# Altium PCB Cap_Sensor_8x8.PcbDoc
Units mil, origin at the board's own origin, x right, y up, seen from the top; angles counter-clockwise.
Board outline 3170 x 4550 mil, 2 copper layers (Top Layer, Bottom Layer); 74 components, 83 nets, 392 pads, 146 vias.
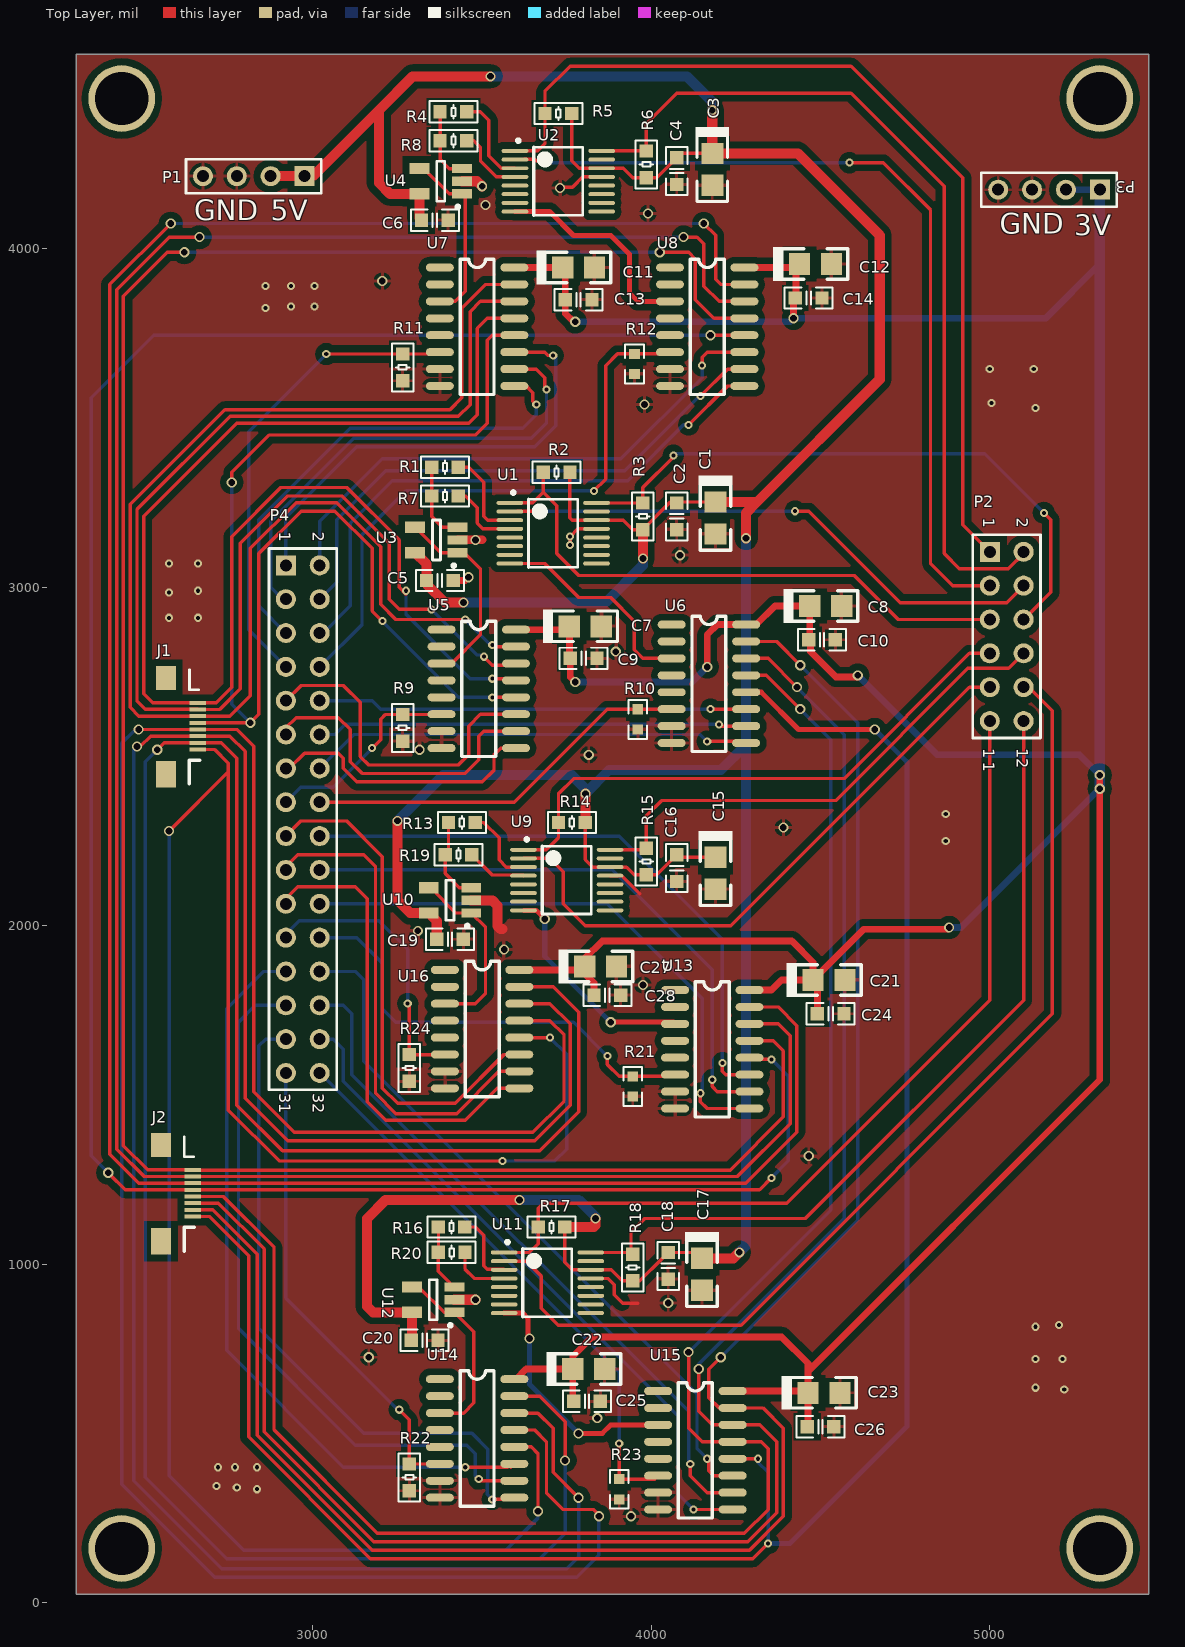
[diagram p0: Top Layer view]
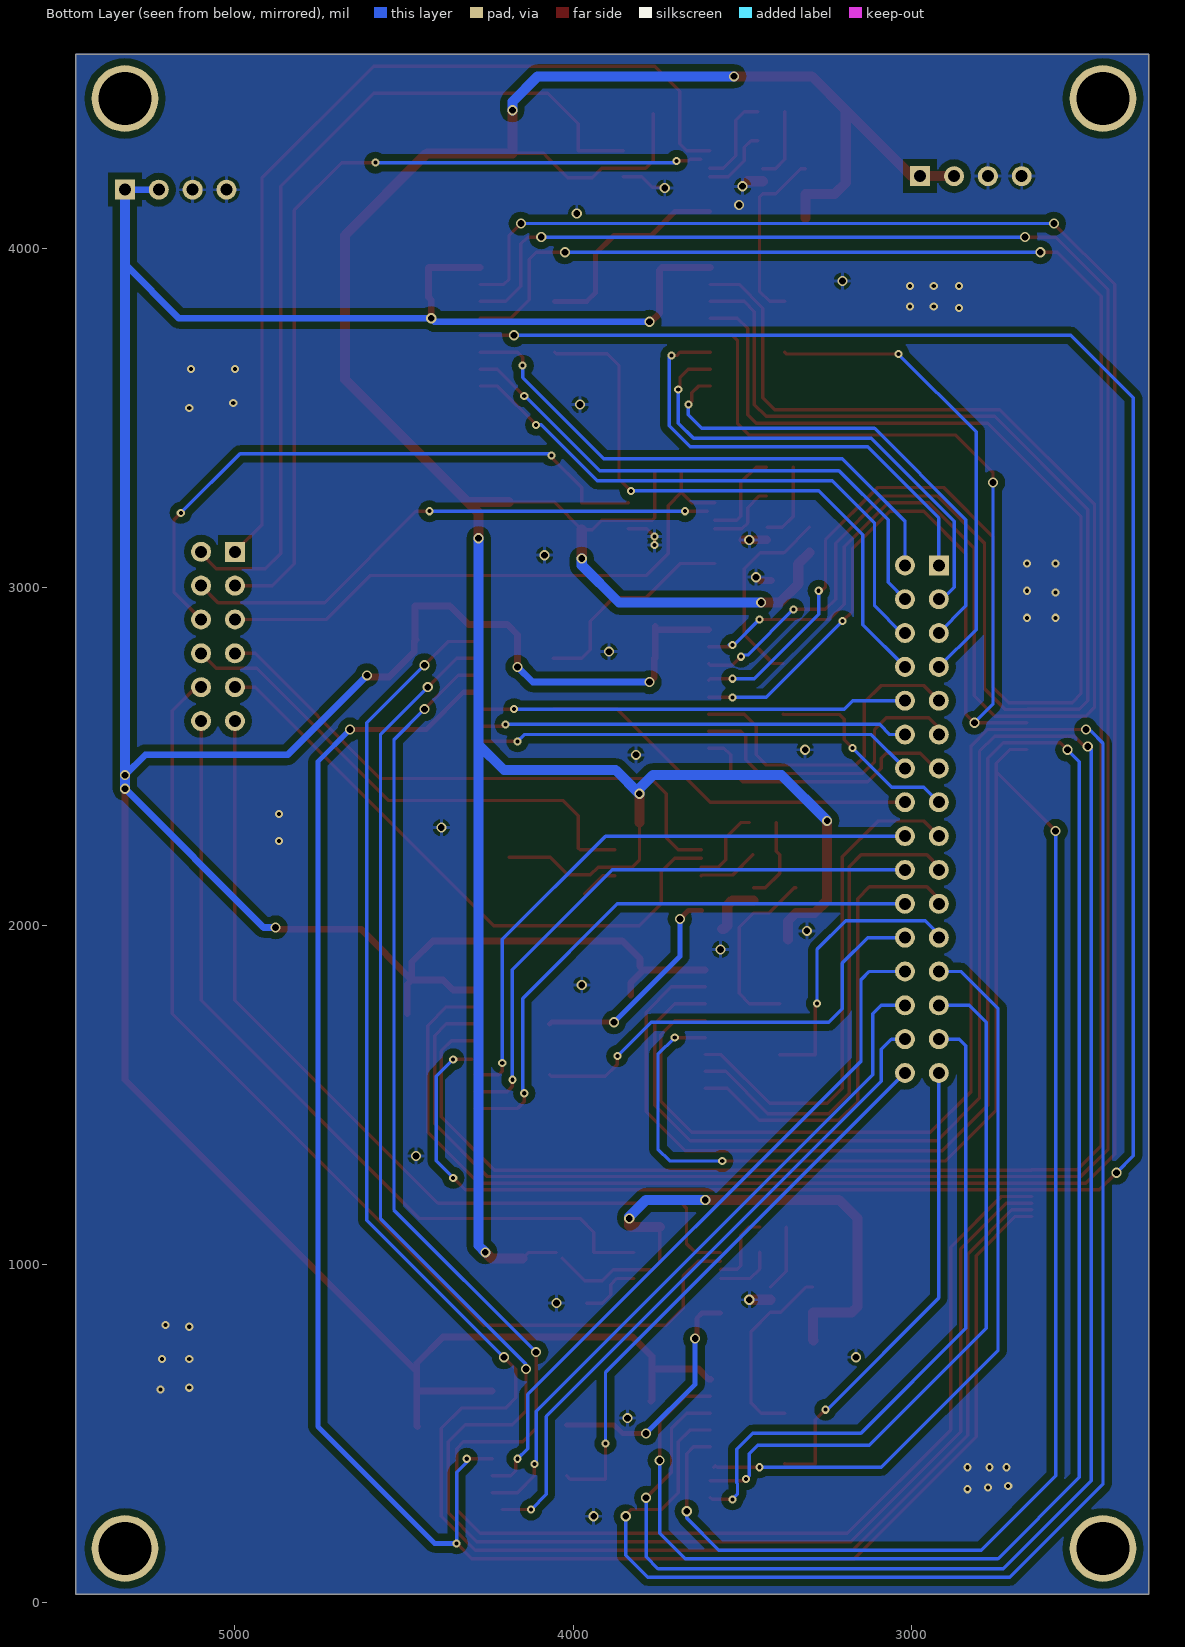
[diagram p1: Bottom Layer view, seen from below]
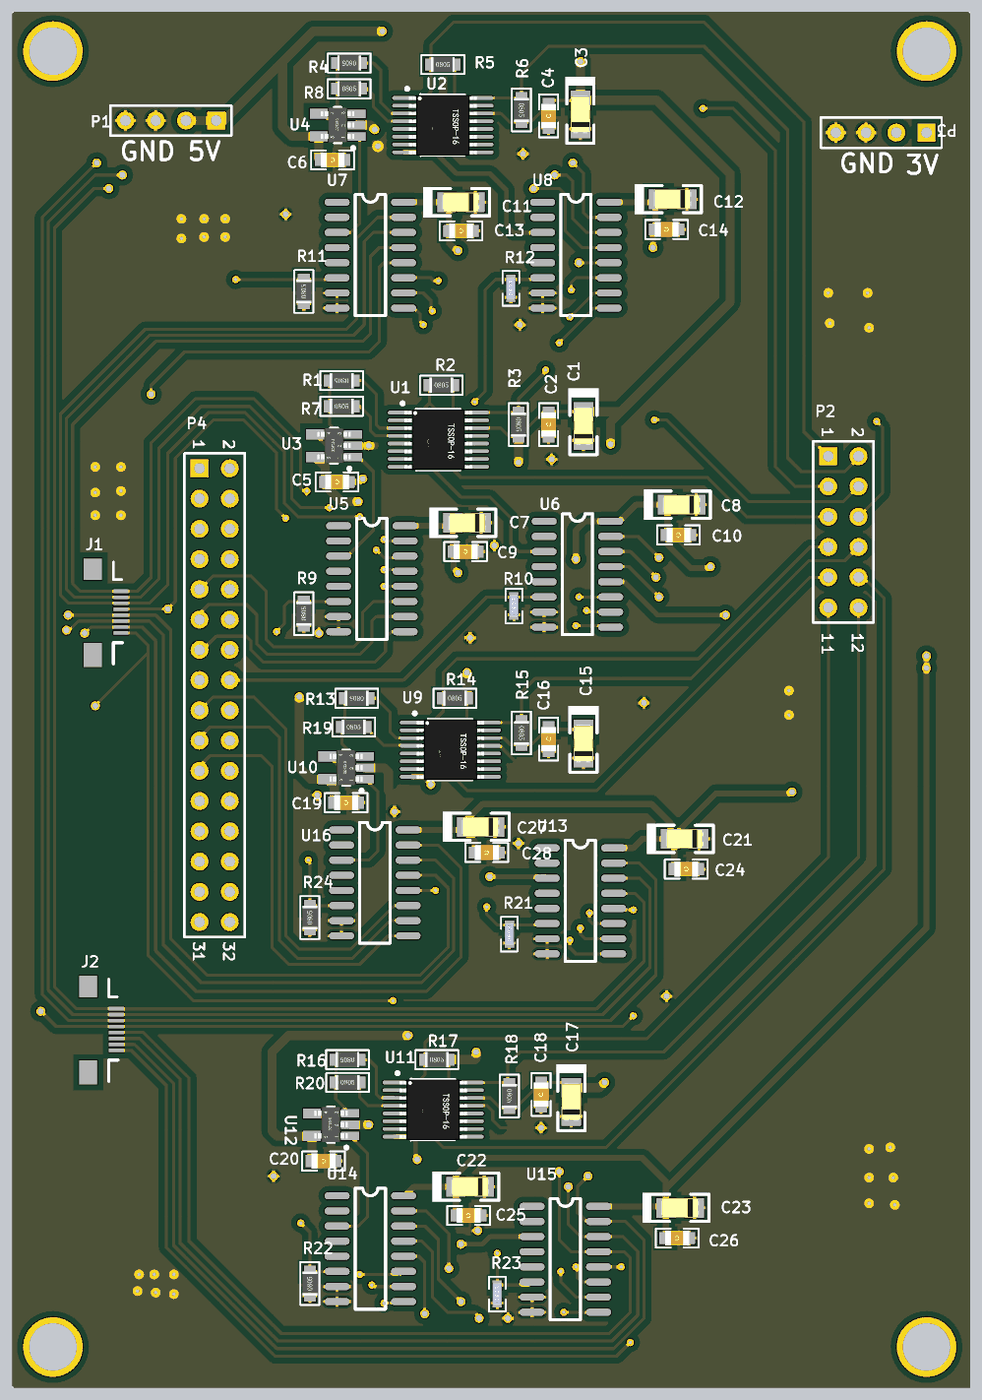
[diagram p2: 3D render of the assembled board from above, using the file's embedded part models]

## Layer stack, top to bottom
Top Solder: solder mask 0.4, Solder Resist, Dk 3.5
Top Layer: signal copper 1.4
Dielectric 1: dielectric 12.6, FR-4, Dk 4.8
Bottom Layer: signal copper 1.4
Bottom Solder: solder mask 0.4, Solder Resist, Dk 3.5

## Board outline
2300,25 2300,4575 5470,4575 5470,25

## Design rules (kind name [scope] priority, off if disabled: settings)
Clearance Clearance_1 [InPolygon] p1: gap=20 ignorepadtopadclearanceinfootprint=FALSE except(0: Arc-Hole Track-Hole SMDPad-Hole THPad-Hole Via-Hole Fill-Hole Poly-Hole Region-Hole Text-Hole)
Clearance [All] p2: gap=4 ignorepadtopadclearanceinfootprint=FALSE except(0: Arc-Hole Track-Hole SMDPad-Hole THPad-Hole Via-Hole Fill-Hole Poly-Hole Region-Hole Text-Hole)
PolygonConnect [All] p1: connectstyle=Relief reliefconductorwidth=10 reliefentries=4 polygonreliefangle="90 Angle" airgapwidth=10
RoutingVias [All] p1: holewidth=20 width=30 viastyle="Through Hole" minholewidth=20 minwidth=30 maxholewidth=20 maxwidth=30
SolderMaskExpansion [All] p1: expansion=4
Width Width_1 [All] p1: maxlimit=30 minlimit=10 preferedwidth=20
Width Width_vcc [InNet('VDD_5V')] p2: maxlimit=50 minlimit=10 preferedwidth=20
30 further rules are at their usual default settings.

## Components (designator, comment, footprint, x,y, rotation, side; value= is the part's Value field where it differs from the comment)
C1 "Cap Pol2" Cap-TA 4190,3205 r90 top
C2 "Cap" 0805C 4075,3210 r90 top
C3 "Cap Pol2" Cap-TA 4180,4235 r90 top
C4 "Cap" 0805C 4075,4230 r90 top
C5 "Cap" 0805C 3375,3020 r180 top
C6 "Cap" 0805C 3360,4085 r180 top
C7 "Cap Pol2" Cap-TA 3805,2885 r180 top
C8 "Cap Pol2" Cap-TA 4515,2945 r180 top
C9 "Cap" 0805C 3800,2790 r180 top
C10 "Cap" 0805C 4504.37,2845 r180 top
C11 "Cap Pol2" Cap-TA 3785,3945 r180 top
C12 "Cap Pol2" Cap-TA 4485,3955 r180 top
C13 "Cap" 0805C 3785,3850 r180 top
C14 "Cap" 0805C 4465,3855 r180 top
C15 "Cap Pol2" Cap-TA 4190,2155 r90 top
C16 "Cap" 0805C 4075,2170 r90 top
C17 "Cap Pol2" Cap-TA 4150,970 r90 top
C18 "Cap" 0805C 4050,995 r90 top
C19 "Cap" 0805C 3405,1960 r180 top
C20 "Cap" 0805C 3330,775 r180 top
C21 "Cap Pol2" Cap-TA 4525,1840 r180 top
C22 "Cap Pol2" Cap-TA 3815,690 r180 top
C23 "Cap Pol2" Cap-TA 4510,620 r180 top
C24 "Cap" 0805C 4530,1740 r180 top
C25 "Cap" 0805C 3810,595 r180 top
C26 "Cap" 0805C 4500,520 r180 top
C27 "Cap Pol2" Cap-TA 3850,1880 r180 top
C28 "Cap" 0805C 3870,1795 r180 top
J1 "FPC_8P" FPC8-0.5 2660,2658.74 r270 top
J2 "FPC_8P" FPC8-0.5 2645,1278.74 r270 top
P1 "Header 4" HDR1X4 2975,4215 r180 top
P2 "Header 6X2" HDR2X6 5000,3105 r270 top
P3 "Header 4" HDR1X4 5325,4175 r180 top
P4 "Header 16X2" HDR2X16 2920,3065 r270 top
R1 "Res" 0805R 3390,3355 r180 top
R2 "Res" 0805R 3720,3340 r0 top
R3 "Res" 0805R 3975,3210 r270 top
R4 "Res" 0805R 3415,4405 r180 top
R5 "Res" 0805R 3725,4400 r0 top
R6 "Res" 0805R 3985,4250 r270 top
R7 "Res" 0805R 3390,3270 r0 top
R8 "Res" 0805R 3415,4320 r0 top
R9 "Res" 0805R 3265,2585 r90 top
R10 "Res" 0603R 3960,2610 r90 top
R11 "Res" 0805R 3265,3650 r90 top
R12 "Res" 0603R 3950,3660 r90 top
R13 "Res" 0805R 3440,2305 r180 top
R14 "Res" 0805R 3765,2305 r0 top
R15 "Res" 0805R 3985,2190 r270 top
R16 "Res" 0805R 3409.37,1110 r180 top
R17 "Res" 0805R 3705,1110 r0 top
R18 "Res" 0805R 3945,990 r270 top
R19 "Res" 0805R 3430,2210 r0 top
R20 "Res" 0805R 3410,1035 r0 top
R21 "Res" 0603R 3945,1525 r90 top
R22 "Res" 0805R 3285,370 r90 top
R23 "Res" 0603R 3905,335 r90 top
R24 "Res" 0805R 3285,1580 r90 top
U1 "AD7746" TSSOP16 3710,3160 r0 top
U2 "AD7746" TSSOP16 3725,4200 r0 top
U3 "AD8515" sot23-5 3365,3140 r180 top
U4 "AD8515" sot23-5 3377.2,4200 r180 top
U5 "CD4051" SO16 3540,2900 r0 top
U6 "CD4051" SO16 4220,2915 r0 top
U7 "CD4051" SO16 3535,3970 r0 top
U8 "CD4051" SO16 4215,3970 r0 top
U9 "AD7746" TSSOP16 3750,2135 r0 top
U10 "AD8515" sot23-5 3405,2075 r180 top
U11 "AD7746" TSSOP16 3692.95,945 r0 top
U12 "AD8515" sot23-5 3355,895 r180 top
U13 "CD4051" SO16 4230,1835 r0 top
U14 "CD4051" SO16 3535,685 r0 top
U15 "CD4051" SO16 4180,650 r0 top
U16 "CD4051" SO16 3550,1894.57 r0 top

## Footprints (in the part's own frame and the unit in brackets; to place one, negate y for a bottom-side part, rotate by r counter-clockwise, add the part's x,y. Pads: shape width x height; smd on the part's side, far side on the other; paste and mask are expansions set on the pad)
0603R [mm]
  rect 0.76x0.8 smd: 1(-0.76,0) 2(0.76,0)
  silkscreen extent -1.46,-0.7 1.46,0.7, body extent -1,-0.39 1,0.39, height 0.79
0805C [mm]
  rect 1x1 smd: 1(-1,0) 2(1,0)
  silkscreen extent -1.8,-0.8 1.8,0.8, body extent -1.01,-0.62 1,0.63, height 0.92
0805R [mm]
  rect 1x1 smd: 1(-1,0) 2(1,0)
  silkscreen extent -1.8,-0.8 1.8,0.8, body extent -1,-0.63 1,0.63, height 0.55
Cap-TA [mm]
  rect 1.6x1.65 smd: 1(1.2,0) 2(-1.2,0)
  silkscreen extent -2.41,-1.27 3.17,1.27, body extent -1.6,-0.8 1.6,0.8, height 1.61
FPC8-0.5 [mm]
  rect 0.3x1.25 smd: 1(0,0) 2(0.5,0) 3(1,0) 4(1.5,0) 5(2,0) 6(2.5,0) 7(3,0) 8(3.5,0)
  rect 1.8x1.5 smd: 9(-1.85,-2.375)
  rect 2x1.5 smd: 10(5.35,-2.375)
  silkscreen extent -2.48,-0.64 6.1,0.13
HDR1X4 [mm] "Connector; Header; 4 Position"
  rect 1.5x1.5 hole 0.9: 1(0,0)
  round 1.5 hole 0.9: 2(2.54,0) 3(5.08,0) 4(7.62,0)
  silkscreen extent -1.27,-1.27 8.89,1.27
HDR2X6 [mm] "Connector; Header; 6x2 Position"
  rect 1.5x1.5 hole 0.9: 1(0,0)
  round 1.5 hole 0.9: 2(0,2.54) 3(2.54,0) 4(2.54,2.54) 5(5.08,0) 6(5.08,2.54) 7(7.62,0) 8(7.62,2.54) 9(10.16,0) 10(10.16,2.54) 11(12.7,0) 12(12.7,2.54)
  silkscreen extent -1.27,-1.27 13.97,3.81
HDR2X16 [mm] "Connector; Header; 16x2 Position"
  rect 1.5x1.5 hole 0.9: 1(0,0)
  round 1.5 hole 0.9: 2(0,2.54) 3(2.54,0) 4(2.54,2.54) 5(5.08,0) 6(5.08,2.54) 7(7.62,0) 8(7.62,2.54) 9(10.16,0) 10(10.16,2.54) 11(12.7,0) 12(12.7,2.54) 13(15.24,0) 14(15.24,2.54) 15(17.78,0) 16(17.78,2.54) 17(20.32,0) 18(20.32,2.54) 19(22.86,0) 20(22.86,2.54) 21(25.4,0) 22(25.4,2.54) 23(27.94,0) 24(27.94,2.54) 25(30.48,0) 26(30.48,2.54) 27(33.02,0) 28(33.02,2.54) 29(35.56,0) 30(35.56,2.54) 31(38.1,0) 32(38.1,2.54)
  silkscreen extent -1.27,-1.27 39.37,3.81
SO16 [mm]
  oval 2.1x0.6 smd: 1(-4.064,-0.635) 2(-4.064,-1.905) 3(-4.064,-3.175) 4(-4.064,-4.445) 5(-4.064,-5.715) 6(-4.064,-6.985) 7(-4.064,-8.255) 8(-4.064,-9.525) 9(1.524,-9.525) 10(1.524,-8.255) 11(1.524,-6.985) 12(1.524,-5.715) 13(1.524,-4.445) 14(1.524,-3.175) 15(1.524,-1.905) 16(1.524,-0.635)
  silkscreen extent -2.54,-10.16 0,0
sot23-5 [mm]
  rect 1.5x0.7 smd: 1(-1.595,0.95) 2(-1.595,0) 3(-1.595,-0.95)
  rect 1.5x0.85 smd: 4(1.595,-0.95) 5(1.595,0.95)
  silkscreen extent -1.42,-1.5 0.3,2.05, body extent -1.39,-1.46 1.41,1.44, height 1.09
TSSOP16 [mm]
  oval 2x0.3 smd: 1(-3.25,2.275) 2(-3.25,1.625) 3(-3.25,0.975) 4(-3.25,0.325) 5(-3.25,-0.325) 6(-3.25,-0.975) 7(-3.25,-1.625) 8(-3.25,-2.275) 9(3.25,-2.275) 10(3.25,-1.625) 11(3.25,-0.975) 12(3.25,-0.325) 13(3.25,0.325) 14(3.25,0.975) 15(3.25,1.625) 16(3.25,2.275)
  silkscreen extent -3.12,-2.55 1.83,3.17, body extent -2.85,-2.56 2.85,2.54, height 1.45

## Part data
C1 C3 C7 C8 C11 C12 C15 C17 C21 C22 C23 C27: "Polarized Capacitor (Axial)"
C2 C4 C5 C6 C9 C10 C13 C14 C16 C18 C19 C20 C24 C25 C26 C28: "Capacitor"
P1 P3: "Header, 4-Pin"
P2: "Header, 6-Pin, Dual row"
P4: "Header, 16-Pin, Dual row"
R1 R2 R3 R4 R5 R6 R7 R8 R9 R10 R11 R12 R13 R14 R15 R16 R17 R18 R19 R20 R21 R22 R23 R24: "Resistor"

## Free pads (board coordinates)
  round 196.85 hole 157.48: 0(2435,4444.37) 1(5325,4444.37) 2(5325,160) 3(2435,160)

## Via types
v1: diameter 24, hole 12, Top Layer to Bottom Layer, 77 vias
v2: diameter 30, hole 20, Top Layer to Bottom Layer, 69 vias

## Nets (pads, with @x,y where several pads share a name; then routed paths per layer and width w, separated by ;. In a path a pad name is that pad's centre, name@x,y a point inside that pad or via, vN(x,y) a via of type N, cw(c..) or ccw(c..) an arc to the next point about the centre after c; other vN are vias at no path point)
GND: C1.2 C2.1 C3.2 C4.1 C5.1 C6.1 C7.2 C8.2 C9.1 C10.1 C11.2 C12.2 C13.1 C14.1 C15.2 C16.1 C17.2 C18.1 C19.1 C20.1 C21.2 C22.2 C23.2 C24.1 C25.1 C26.1 C27.2 C28.1 P1.3 P1.4 P3.3 P3.4 R9.1 R10.1 R11.1 R12.1 R21.1 R22.1 R23.1 R24.1 U1.13 U2.13 U3.2 U4.2 U5.7 U5.8 U6.7 U6.8 U7.7 U7.8 U8.7 U8.8 U9.13 U10.2 U11.13 U12.2 U13.7 U13.8 U14.7 U14.8 U15.7 U15.8 U16.7 U16.8 | length 957.9
  Top Layer w10: v2(3730,4180) 3731.98,4181.98 3766.98,4181.98 3797.8,4212.8 U2.13 ; v1(3760,3125) v1(3760,3150) 3782.8,3172.8 U1.13 ; U11.13 3871.16,957.8 3889.99,938.97 3889.99,910.01 3915,885 3960,885 ; U9.13 3912.96,2147.8 3965.76,2095
  Top Layer w20: C5.1 3450,3020 v2(3460,3030)
  Top Layer w25: U3.2 v2(3480,3140) 3500,3140
  Top Layer w30: U12.2 v2(3480,895) ; U4.2 3485,4200 v2(3500,4185) ; U10.2 3530,2075 3545,2060 3545,1999.7 3554.7,1990 3560,1990
  other v1: 2835,335 2775,340 2715,345 2720,400 2770,400 2835,400 5220,630 5135,635 5135,720 5215,720 5135,815 5205,820 4870,2250 4870,2330 2575,2910 2660,2910 2575,2985 2660,2990 2575,3070 2660,3070 5135,3530 5005,3545 5000,3645 5130,3645 2860,3825 2935,3830 3005,3830 2860,3890 2935,3890 3005,3890
  other v2: 3940,255 3840,545 3165,725 4050,885 4465,1320 3975,1825 3565,1930 3310,1985 4390,2290 3815,2505 3315,2520 3895,2810 4085,3095 3980,3540 3205,3905 3990,4105 3510,4130
NetR1_1: R1.1 U1.3 | length 276.1
  Top Layer w10: R1.1 3460,3355 3505,3310 3505,3210 3516.61,3198.39 U1.3
NetR1_2: R1.2 R7.1 U3.3 | length 236
  Top Layer w10: R1.2 R7.1 3350.63,3209.37 3382.6,3177.4 U3.3
NetR4_1: R4.1 U2.3 | length 273.2
  Top Layer w10: R4.1 3495,4405 3520,4380 3520,4275 3556.61,4238.39 U2.3
NetR4_2: R4.2 R8.1 U4.3 | length 216.2
  Top Layer w10: R4.2 R8.1 3375.63,4264.37 3402.6,4237.4 U4.3
NetR7_2: R7.2 U1.4 | length 219.3
  Top Layer w10: R7.2 3450,3270 3485,3235 3485,3190 3502.2,3172.8 U1.4
NetR8_2: R8.2 U2.4 | length 210.5
  Top Layer w10: R8.2 3475,4320 3495,4300 3495,4260 3542.2,4212.8 U2.4
NetR13_1: R13.1 U9.3 | length 235.3
  Top Layer w10: R13.1 3505,2305 3550,2260 3550,2195 3571.61,2173.39 U9.3
NetR13_2: R13.2 R19.1 U10.3 | length 249.3
  Top Layer w10: R13.2 3400.63,2220 R19.1 3390.63,2154.37 3432.6,2112.4 U10.3
NetR16_1: R16.1 U11.3 | length 221.4
  Top Layer w10: R16.1 3480,1110 3505,1085 3505,995 3515,985 3563.39,985 U11.3
NetR16_2: R16.2 R20.1 U12.3 | length 198.3
  Top Layer w10: R16.2 3371,1110 3371,1035.37 R20.1 3370.63,979.57 U12.3
NetR19_2: R19.2 U9.4 | length 178.4
  Top Layer w10: R19.2 3529.37,2150 3619.84,2150 U9.4
NetR20_2: R20.2 U11.4 | length 176.5
  Top Layer w10: R20.2 3449.37,985.63 3477.2,957.8 U11.4
RDY1: P2.3 U2.2 | length 2510.4
  Top Layer w10: U2.2@3623.66,4265 3655,4265 3660,4260 v1(3695,4260) ; v1(4585,4255) 4685,4255 4825,4115 4825,3070 4890,3005 P2.3
  Bottom Layer w10: v1(3695,4260) 3700,4255 v1(4585,4255)
RDY2: P2.4 U1.2 | length 1628.9
  Top Layer w10: U1.2@3603.66,3225 v1(3670,3225) ; v1(4425,3225) 4465,3225 4735,2955 5050,2955 P2.4
  Bottom Layer w10: v1(3670,3225) v1(4425,3225)
RDY3: P2.9 U9.2 | length 1808
  Top Layer w10: U9.2 3701.02,2198.98 3740,2160 3740,2065 3805,2000 4235,2000 4940,2705 P2.9
RDY4: P2.10 U11.2 | length 3144
  Top Layer w10: U11.2 3631.02,1008.98 3675,965 3675,870 3725,820 4265,820 5185,1740 5185,2635 5115,2705 P2.10
SCL1: P2.1 R5.1 U2.1 | length 2792.3
  Top Layer w10: U2.1 3664.57,4289.57 3685.63,4310.63 R5.1 3685.63,4465.63 3760,4540 4590,4540 4920,4210 4920,3185 P2.1
SCL2: P2.5 R2.1 U1.1 | length 1728.5
  Top Layer w10: U1.1 3649.57,3249.57 3680.63,3280.63 ; R2.1 3680.63,3280.63 ; P2.5 4730,2905 4600,3035 3785,3035 3720,3100 3720,3241.26 3680.63,3280.63
SCL3: P2.7 R14.1 U9.1 | length 1694.5
  Top Layer w10: U9.1 3689.57,2224.57 3725.63,2260.63 R14.1 3725.63,2390.63 3770,2435 4570,2435 4940,2805 P2.7
SCL4: P2.11 R17.1 U11.1 | length 2630.3
  Top Layer w10: U11.1 3639.57,1034.57 3665.63,1060.63 R17.1 3665.63,1165.63 3680,1180 4400,1180 5000,1780 P2.11
SDA1: P2.2 R6.1 U2.16 | length 2606.2
  Top Layer w10: U2.16 3984.8,4289.57 R6.1 3985,4370 4075,4460 4590,4460 4865,4185 4865,3100 4910,3055 5055,3055 5100,3100 P2.2
SDA2: P2.6 R3.1 U1.16 | length 1828.9
  Top Layer w10: U1.16 3838.15,3249.37 R3.1 3975,3295 v1@4065,3385 ; P2.6 5180,2985 5180,3200 v1(5160,3220)
  Bottom Layer w10: v1@4070,3395 4985,3395 v1(5160,3220)
  other v1: 4065,3390
SDA3: P2.8 R15.1 U9.16 | length 1518.5
  Top Layer w10: U9.16 3980.2,2224.57 R15.1 3985,2325 4030,2370 4545,2370 4935.47,2760.47 5055.47,2760.47 P2.8
SDA4: P2.12 R18.1 U11.16 | length 2448.1
  Top Layer w10: U11.16 3939.8,1034.57 3939.8,1094.8 3980,1135 4455,1135 5100,1780 P2.12
Switch1_Down: U2.8 U8.3 | length 635.3
  Top Layer w15: U2.8 3699.57,4110.43 3770,4040 3880,4040 3935,3985 3935,3870 3960,3845 U8.3
Switch1_Down_A: P4.2 U8.11 | length 1627.3
  Top Layer w10: v1(4150,3655) 4150,3680 4165,3695 U8.11
  Bottom Layer w10: P4.2 3020,3195 3205,3380 3910,3380 4150,3620 v1(4150,3655)
Switch1_Down_B: P4.4 U8.10 | length 1645
  Top Layer w10: v1(4145,3565) 4225,3645 U8.10
  Bottom Layer w10: P4.4 3070,3015 3070,3200 3215,3345 3921.82,3345 4141.82,3565 v1(4145,3565)
Switch1_Down_C: P4.6 U8.9 | length 1700.9
  Top Layer w10: v1(4110,3480) 4225,3595 U8.9
  Bottom Layer w10: P4.6 3030,2865 3110,2945 3110,3190 3235,3315 3930,3315 4095,3480 v1(4110,3480)
Switch1_Down_INH: P4.8 R12.2 U8.6 | length 1771.7
  Top Layer w10: v1(3830,3285) 3865,3320 3865,3655 3899.92,3689.92 R12.2 4049.92,3689.92 U8.6
  Bottom Layer w10: P4.8 3145,2890 3145,3155 3275,3285 v1(3830,3285)
Switch1_Up: U4.1 U4.4 U7.3 | length 535.7
  Top Layer w10: U4.4 3327.6,4237.4 3402.4,4162.6 U4.1 3450,4152.6 3450,3875 3420,3845 U7.3
Switch1_Up_A: P4.1 U7.11 | length 1379.7
  Top Layer w10: U7.11 3685,3695 3695,3685 v1(3710,3685)
  Bottom Layer w10: P4.1 2920,3205 3130,3415 3655,3415 3717,3477 3717,3678 v1(3710,3685)
Switch1_Up_B: P4.3 U7.10 | length 1427
  Top Layer w10: U7.10 3660,3645 3685,3620 3685,3590 v1(3690,3585)
  Bottom Layer w10: P4.3 2910,2965 2875,3000 2875,3195 3120,3440 3645,3440 3690,3485 v1(3690,3585)
Switch1_Up_C: P4.5 U7.9 | length 1449
  Top Layer w10: U7.9 3630,3595 3650,3575 3650,3550 v1(3660,3540)
  Bottom Layer w10: P4.5 2840,2945 2840,3200 3110,3470 3620,3470 3660,3510 v1(3660,3540)
Switch1_Up_INH: P4.7 R11.2 U7.6 | length 1402.9
  Top Layer w10: v1(3039.37,3689.37) R11.2 3369.37,3689.37 U7.6
  Bottom Layer w10: P4.7 2810,2875 2810,3460 v1(3039.37,3689.37)
Switch2_Down: U1.8 U6.3 | length 643.9
  Top Layer w10: U1.8 3684.57,3070.43 3785,2970 3880,2970 3950,2900 3950,2815 3975,2790 U6.3
Switch2_Down_A: P4.10 U6.11 | length 1270.4
  Top Layer w10: v1(4175,2640) U6.11
  Bottom Layer w10: P4.10 3175,2665 3200,2640 v1(4175,2640)
Switch2_Down_B: P4.12 U6.10 | length 1274.5
  Top Layer w10: v1(4200,2595) 4205,2590 U6.10
  Bottom Layer w10: P4.12 3065,2565 3095,2595 v1(4200,2595)
Switch2_Down_C: P4.14 U6.9 | length 1311.8
  Top Layer w10: v1(4165,2545) 4275,2545 U6.9
  Bottom Layer w10: P4.14 3120,2565 4145,2565 v1(4165,2545)
Switch2_Down_INH: P4.16 R10.2 U6.6 | length 1153.9
  Top Layer w10: P4.16 3595,2365 3869.92,2639.92 R10.2 4059.92,2639.92 U6.6
Switch2_Up: U3.1 U3.4 U5.3 | length 588.7
  Top Layer w10: U3.4 3302.6,3177.4 3377.4,3102.6 U3.1 3447.4,3102.6 3495,3055 3495,2860 3410,2775 U5.3
Switch2_Up_A: P4.9 U5.11 | length 1001.6
  Top Layer w10: P4.9 2965,2710 3090,2710 3140,2660 3140,2500 3165,2475 3430,2475 3460,2505 3460,2590 3495,2625 U5.11
Switch2_Up_B: P4.11 U5.10 | length 929.2
  Top Layer w10: P4.11 2920,2585 2950,2615 3075,2615 3110,2580 3110,2485 3145,2450 3450,2450 3490,2490 3490,2560 3505,2575 U5.10
Switch2_Up_C: P4.13 U5.9 | length 819.2
  Top Layer w10: P4.13 2930,2465 2975,2510 3075,2510 3090,2495 3090,2465 3130,2425 3500,2425 3535,2460 3535,2505 3555,2525 U5.9
Switch2_Up_INH: P4.15 R9.2 U5.6 | length 602.8
  Top Layer w10: v1(3175,2525) 3200,2550 3200,2610 3214.37,2624.37 R9.2 3379.37,2624.37 U5.6
  Bottom Layer w10: P4.15 2964.53,2409.53 3059.53,2409.53 v1(3175,2525)
Switch3_Down: U9.8 U13.3 | length 651.3
  Top Layer w15: U9.8 3659.57,2045.43 v2(3685,2020) ; v2(3880,1715) 4065,1715 U13.3
  Bottom Layer w15: v2(3685,2020) 3685,1910 v2(3880,1715)
Switch3_Down_A: P4.18 U13.11 | length 1790.5
  Top Layer w10: v1(4210,1595) 4210,1570 4220,1560 U13.11
  Bottom Layer w10: P4.18 3905,2265 4210,1960 v1(4210,1595)
Switch3_Down_B: P4.20 U13.10 | length 1743.4
  Top Layer w10: v1(4180,1545) 4180,1525 4195,1510 U13.10
  Bottom Layer w10: P4.20 3885,2165 4180,1870 v1(4180,1545)
Switch3_Down_C: P4.22 U13.9 | length 1706.3
  Top Layer w10: v1(4145,1505) 4145,1480 4165,1460 U13.9
  Bottom Layer w10: P4.22 3870,2065 4150,1785 4150,1510 v1(4145,1505)
Switch3_Down_INH: P4.24 R21.2 U13.6 | length 1315.7
  Top Layer w10: v1(3870,1615) 3870,1590 3905.08,1554.92 R21.2 4064.92,1554.92 U13.6
  Bottom Layer w10: P4.24 3130,1965 3205,1890 3205,1755 3245,1715 3770,1715 v1(3870,1615)
Switch3_Up: U10.1 U10.4 U16.3 | length 544.3
  Top Layer w10: U10.4 3347.6,2112.4 3422.4,2037.6 U10.1 3510,1995.39 3510,1800 3479.57,1769.57 U16.3
Switch3_Up_A: P4.17 U16.11 | length 1514.7
  Top Layer w10: P4.17 2964.53,2309.53 3099.53,2309.53 3205,2204.06 3205,1520 3250,1475 3420,1475 3564.57,1619.57 U16.11
Switch3_Up_B: P4.19 U16.10 | length 1475.4
  Top Layer w10: P4.19 2920,2175 2955,2210 3150,2210 3185,2175 3185,1505 3245,1445 3425,1445 3549.57,1569.57 U16.10
Switch3_Up_C: P4.21 U16.9 | length 1395.9
  Top Layer w10: P4.21 2920,2080 2955,2115 3125,2115 3160,2080 3160,1480 3215,1425 3450,1425 3544.57,1519.57 U16.9
Switch3_Up_INH: P4.23 R24.2 U16.6 | length 839.3
  Top Layer w10: v1(3280,1770) 3285,1765 R24.2 U16.6@3389.8,1619.37
  Bottom Layer w10: P4.23 2920,1975 2960,2015 3195,2015 3280,1930 v1(3280,1770)
Switch4_Down: U11.8 U15.3 | length 723.9
  Top Layer w15: U11.8 3619.57,855.43 3635,840 3635,785 v2(3640,780) ; v2(3785,500) 3855,500 3880,525 U15.3
  Bottom Layer w15: v2(3640,780) 3640,645 v2(3785,500)
Switch4_Down_A: P4.26 U15.11 | length 2089.1
  Top Layer w10: v1(4165,425) 4170,420 4170,390 4185,375 U15.11
  Bottom Layer w10: P4.26 3125,1865 3150,1840 3150,1600 4135,615 4135,455 v1(4165,425)
Switch4_Down_B: P4.28 U15.10 | length 2030.3
  Top Layer w10: v1(4115,410) 4115,375 4165,325 U15.10
  Bottom Layer w10: P4.28 3090,1765 3115,1740 3115,1560 4110,565 4110,415 v1(4115,410)
Switch4_Down_C: P4.30 U15.9 | length 1956.1
  Top Layer w10: v1(4125,275) U15.9@4210,275
  Bottom Layer w10: P4.30 3060,1665 3090,1635 3090,1540 4080,550 4080,320 v1(4125,275)
Switch4_Down_INH: P4.32 R23.2 U15.6 | length 1685.8
  Top Layer w10: v1(3905,470) R23.2 4009.92,364.92 U15.6
  Bottom Layer w10: P4.32 3905,680 v1(3905,470)
Switch4_Up: U12.1 U12.4 U14.3 | length 560.3
  Top Layer w10: U12.4 3312.6,932.4 3387.4,857.6 U12.1 3475,800.39 3475,590 3445,560 U14.3
Switch4_Up_A: P4.25 U14.11 | length 2217.6
  Top Layer w10: v1(3450,400) 3575,400 3580,405 U14.11@3585,400
  Bottom Layer w10: P4.25 2855,1865 2745,1755 2745,745 3090,400 v1(3450,400)
Switch4_Up_B: P4.27 U14.10 | length 2105.2
  Top Layer w10: v1(3490,365) 3495,360 U14.10
  Bottom Layer w10: P4.27 2830,1765 2780,1715 2780,810 3125,465 3455,465 3480,440 3480,375 v1(3490,365)
Switch4_Up_C: P4.29 U14.9 | length 1970.3
  Top Layer w10: v1(3530,305) 3590,305 U14.9
  Bottom Layer w10: P4.29 2860,1665 2840,1645 2840,810 3150,500 3470,500 3517,453 3517,353.82 3515,351.82 3515,320 v1(3530,305)
Switch4_Up_INH: P4.31 R22.2 U14.6 | length 1400
  Top Layer w10: v1(3255,570) 3285,540 R22.2 3374.37,409.37 U14.6
  Bottom Layer w10: P4.31 2920,900 3250,570 v1(3255,570)
Switch_Down_CH0: J2.1 U8.13 U13.13 | length 6902.2
  Top Layer w10: v2(2620,3990) 2570,3990 2440,3860 2440,1350 2511.26,1278.74 J2.1 2645.74,1278 4233,1278 4390,1435 4390,1630 4360,1660 U13.13 ; v2(4025,3990) 4110,3990 4130,3970 4130,3850 4185,3795 U8.13
  Bottom Layer w10: v2(2620,3990) v2(4025,3990)
Switch_Down_CH1: J2.2 U8.14 U13.14 | length 7093.7
  Top Layer w10: v2(2665,4035) 2575,4035 2420,3880 2420,1340 2500.95,1259.05 J2.2 4254.05,1259.05 4410,1415 4410,1675 4375,1710 U13.14 ; v2(4095,4035) 4135,4035 4155,4015 4155,3890 4200,3845 U8.14
  Bottom Layer w10: v2(2665,4035) v2(4095,4035)
Switch_Down_CH2: J2.3 U8.15 U13.15 | length 7275.9
  Top Layer w10: v2(2580,4075) 2400,3895 2400,1325 2485.63,1239.37 J2.3 4279.37,1239.37 4430,1390 4430,1705 4375,1760 U13.15 ; v2(4155,4075) 4190,4040 4190,3910 4205,3895 U8.15
  Bottom Layer w10: v2(2580,4075) v2(4155,4075)
Switch_Down_CH3: J2.4 U8.12 U13.12 | length 6752.2
  Top Layer w10: v2@2400,1265 2445.32,1219.68 J2.4 4319.68,1219.68 v1(4355,1255) ; v2(4175,3745) U8.12 ; U13.12@4300,1605 v1(4355,1605)
  Bottom Layer w10: v2(2395,1270) 2345,1320 2345,3560 2530,3745 v2(4175,3745) ; v1(4355,1255) 4405,1305 4405,1555 v1(4355,1605)
Switch_Down_CH4: J2.5 U6.13 U15.13 | length 5435
  Top Layer w10: J2.5 2735,1200 2885,1050 2885,510 3190,205 4275,205 4345,275 4345,455 4325,475 U15.13 4150,475 4110,515 v2(4110,740) ; U6.13 4340,2740 v2(4440,2640)
  Bottom Layer w10: v2(4110,740) 4530,1160 4530,2550 v2(4440,2640)
Switch_Down_CH5: J2.6 U6.14 U15.14 | length 5529.8
  Top Layer w10: J2.6 2720.31,1180.31 2855.63,1045 2855.63,504.37 3180,180 4285,180 4370,265 4370,475 4320,525 U15.14 4180,525 4140,565 v2(4140,690) ; U6.14 4345,2790 v2(4430,2705)
  Bottom Layer w10: v2(4140,690) 4140,705 4570,1135 4570,2565 v2(4430,2705)
Switch_Down_CH6: J2.7 U6.15 U15.15 | length 5640.3
  Top Layer w10: J2.7 2704.37,1160.63 2835,1030 2835,495 3175,155 4290,155 4390,255 4390,515 4330,575 U15.15 4200,575 4170,605 4170,690 v2(4205,725) ; U6.15 4370,2840 v2(4440,2770)
  Bottom Layer w10: v2(4205,725) 4610,1130 4610,2600 v2(4440,2770)
Switch_Down_CH7: J2.8 U6.12 U15.12 | length 5870.2
  Top Layer w10: J2.8 2694.06,1140.94 2810,1025 2810,490 3170,130 4300,130 v1(4345,175) ; U15.12 v1(4315,425)
  Top Layer w15: U6.12 4325,2690 4435,2580 4650,2580 4655,2585 v2(4660,2580)
  Bottom Layer w10: v1(4315,425) 4315,415 4345,385 v1(4345,175)
  Bottom Layer w15: v1(4345,175) 4410,175 4755,520 4755,2485 v2(4660,2580)
Switch_Up_CH0: J1.1 U5.13 U7.13 | length 4020
  Top Layer w10: v1(3275,2990) 3275,2980 3255,3000 3255,3140 3100,3295 2905,3295 2760,3150 2760,2705 2713.74,2658.74 J1.1 2526.26,2658.74 2500,2685 2500,3210 2775,3485 3460,3485 3485,3510 3485,3765 3515,3795 U7.13 ; v1(3530,2730) 3595,2730 U5.13
  Bottom Layer w10: v1(3275,2990) 3275,2920 3465,2730 v1(3530,2730)
Switch_Up_CH1: J1.2 U5.14 U7.14 | length 4044.3
  Top Layer w10: J1.2@2659.05,2640 2505,2640 2480,2665 2480,3230 2755,3505 3430,3505 3465,3540 3465,3815 3495,3845 U7.14 ; J1.2 2724.05,2639.05 2785,2700 2785,3130 2925,3270 3085,3270 3225,3130 3225,2965 3255,2935 v1(3350,2935) ; v1(3505,2795) 3530,2770 3595,2770 U5.14
  Bottom Layer w10: v1(3350,2935) 3485,2800 3500,2800 v1(3505,2795)
Switch_Up_CH2: J1.3 U5.15 U7.15 | length 4110.3
  Top Layer w10: v1(3450,2905) 3245,2905 3200,2950 3200,3120 3070,3250 2950,3250 2815,3115 2815,2680 2754.37,2619.37 J1.3 2485.63,2619.37 2460,2645 2460,3245 2740,3525 3405,3525 3440,3560 3440,3825 3510,3895 U7.15 ; v1(3530,2830) 3535,2825 U5.15
  Bottom Layer w10: v1(3450,2905) v1@3527.5,2827.5 ; v1(3530,2830) v1@3540,2830
Switch_Up_CH3: J1.4 U5.12 U7.12 | length 3722.5
  Top Layer w10: J1.4 2814.68,2599.68 v2(2815,2600) 2840,2625 2840,3100 2965,3225 3065,3225 3175,3115 3175,2930 v1(3205,2900) ; v2(2760,3310) 2760,3340 2870,3450 3480,3450 3515,3485 3515,3730 3530,3745 U7.12 ; v1(3530,2675) U5.12
  Bottom Layer w10: v2(2760,3310) 2760,2655 v2(2815,2600) ; v1(3205,2900) 3430,2675 v1(3530,2675)
Switch_Up_CH4: J1.5 U14.13 U16.13 | length 7092.5
  Top Layer w10: v2@2475,2580 J1.5 2775,2580 2825,2530 2825,1510 2945,1390 3650,1390 3742,1482 3742,1678 3700.43,1719.57 U16.13 ; U14.13 3655,510 3690,475 3690,325 3740,275 3830,275 3845,260 v2(3845,255)
  Bottom Layer w10: 2470,2575 2435,2540 2435,350 2710,75 3780,75 3845,140 v2(3845,255)
  other v2: 2485,2580
Switch_Up_CH5: J1.6 U14.14 U16.14 | length 7005.2
  Top Layer w10: v2(2480,2530) 2490,2530 2520.31,2560.31 J1.6 2754.69,2560.31 2800,2515 2800,1490 2925,1365 3655,1365 3760,1470 3760,1710 3700.43,1769.57 U16.14 ; U14.14 3665,560 3710,515 3710,385 3780,315 3780,310 v2(3785,310)
  Bottom Layer w10: v2(2480,2530) 2470,2520 2470,360 2730,100 3750,100 3785,135 v2(3785,310)
Switch_Up_CH6: J1.7 U14.15 U16.15 | length 6947.9
  Top Layer w10: v2(2540,2520) 2560.63,2540.63 J1.7 2729.37,2540.63 2775,2495 2775,1470 2910,1335 3670,1335 3785,1450 3785,1745 3710.43,1819.57 U16.15 ; U14.15 3670,610 3745,535 v2(3745,420)
  Bottom Layer w10: v2(2540,2520) 2505,2485 2505,370 2745,130 3670,130 3745,205 v2(3745,420)
Switch_Up_CH7: J1.8 U14.12 U16.12 | length 6290.4
  Top Layer w10: v2(2575,2280) 2750,2455 ; J1.8 2709.06,2520.94 2750,2480 2750,2455 ; v1(3560,1305) 2900,1305 2750,1455 2750,2455 ; U14.12 3645,460 3665,440 v2(3665,270) ; U16.12 v1(3700.43,1669.57)
  Bottom Layer w10: v2(2575,2280) 2575,375 2795,155 3570,155 3665,250 v2(3665,270) ; v1(3560,1305) 3715,1305 3750,1340 3750,1620 v1(3700.43,1669.57)
VDD_3V3: C7.1 C8.1 C9.2 C10.2 C11.1 C12.1 C13.2 C14.2 C21.1 C22.1 C23.1 C24.2 C25.2 C26.2 C27.1 C28.2 P3.1 P3.2 U5.16 U6.16 U7.16 U8.16 U13.16 U14.16 U15.16 U16.16 | length 12490.1
  Top Layer w20: U14.16 3600,660 3630,690 C22.1 ; U7.16 C11.1 3745.63,3937.13 C13.2 3745.63,3809.37 3770,3785 v2(3775,3785) ; U5.16 C7.1@3747.76,2875 ; U16.16 3792.32,1869.57 3830.63,1831.26 C28.2 ; C7.1 3757.76,2792.87 C9.2 3760.63,2734.37 v2(3775,2720) ; C25.2 3767.76,597.87 C22.1 ; C27.1 3802.76,1902.76 3855,1955 4415,1955 4477.76,1892.24 C21.1 ; v2(4165,2765) 4165,2860 4195,2890 U6.16 4310,2890 4365,2945 C8.1 4467.76,2847.76 C10.2 4470,2840 4470,2810 4545,2735 4610,2735 v2(4610,2740) ; U15.16 4457.76,625 C23.1 ; U8.16 4427.76,3945 4427.76,3857.13 C14.2 4420,3849.37 v2(4420,3795) ; U13.16 4355,1810 4385,1840 C21.1 ; C26.2 4462.76,522.13 C23.1 ; C24.2 4490.63,1827.13 C21.1 ; v2(4880,1995) 4875,1990 4627.76,1990 C21.1 ; v2(5325,2445) 5325,1545 4462.76,682.76 ; C22.1 3767.76,727.76 3825,785 4385,785 4462.76,707.24 4462.76,682.76 ; C23.1 4462.76,682.76
  Bottom Layer w20: v2(3775,2720) 4120,2720 v2(4165,2765) ; v2(3775,3785) 4410,3785 v2(4420,3795) 5165,3795 5325,3955 ; v2(4610,2740) 4845,2505 5265,2505 v2(5325,2445) ; v2(4880,1995) 4915,1995 v2(5325,2405) ; P3.2 P3.1
  Bottom Layer w30: v2(5325,2405) v2(5325,2445) 5325,3955 P3.1
VDD_5V: C1.1 C2.2 C3.1 C4.2 C5.2 C6.2 C15.1 C16.2 C17.1 C18.2 C19.2 C20.2 P1.1 P1.2 R2.2 R3.2 R5.2 R6.2 R14.2 R15.2 R17.2 R18.2 U1.14 U2.14 U3.5 U4.5 U9.14 U10.5 U11.14 U12.5 | length 12273
  Top Layer w10: R17.2 3744.37,1005.63 3766.61,983.39 U11.14 3881.61,983.39 3914.37,950.63 R18.2 3966.26,950.63 C18.2@4032.87,1017.24 ; R2.2 3759.37,3205.63 3766.61,3198.39 U1.14 3916.61,3198.39 3944.37,3170.63 R3.2 4056.61,3252.24 C1.1 ; R5.2 3764.37,4260.63 3786.61,4238.39 U2.14 3916.61,4238.39 3944.37,4210.63 R6.2 4016.26,4210.63 C4.2 4087.87,4282.24 C3.1 ; R14.2 3804.37,2195.63 3826.61,2173.39 U9.14 3926.61,2173.39 3949.37,2150.63 R15.2 4016.26,2150.63 4067.87,2202.24 C15.1 ; C18.2 4132.87,1034.37 C17.1
  Top Layer w30: P1.2 P1.1 3000,4215 3195,4410 ; v2(3250,2310) 3250,2075 3287.4,2037.6 U10.5 3365.63,2014.17 C19.2 ; C20.2 3292.2,776.57 U12.5 3177.4,857.6 3160,875 3160,1135 3215,1190 v2(3610,1190) ; U3.5 3302.4,3102.6 3335.63,3069.37 C5.2 3335.63,3009.37 3390,2955 v2(3445,2955) ; C6.2@3314.41,4091.22 U4.5 3227.4,4162.6 3195,4195 3195,4410 ; v2(3525,4510) 3295,4510 3195,4410 ; R17.2 3830,1110 3835,1115 v2(3835,1135) ; R14.2 3805,2305.63 v2(3805,2390) ; v2(3975,3085) R3.2 ; C17.1 4242.24,1017.24 v2(4260,1035) ; v2(4180,4410) C3.1 4432.76,4282.24 4675,4040 4675,3615 4312.24,3252.24 ; C1.1 4312.24,3252.24 ; v2(4280,3145) 4280,3220 4312.24,3252.24
  Bottom Layer w30: v2(3250,2310) 3385,2445 3765,2445 3805,2405 v2(3805,2390) 3875,2460 4205,2460 4280,2535 ; v2(3445,2955) 3865,2955 3975,3065 v2(3975,3085) ; v2(3525,4510) 4105,4510 4180,4435 v2(4180,4410) ; v2(3610,1190) 3785,1190 v2@3835,1140 ; v2(4260,1035) 4280,1055 4280,2535 ; v2(4280,3145) 4280,2535
pads on no net: J1.9 J1.10 J2.9 J2.10 U1.5 U1.6 U1.7 U1.9 U1.10 U1.11 U1.12 U1.15 U2.5 U2.6 U2.7 U2.9 U2.10 U2.11 U2.12 U2.15 U5.1 U5.2 U5.4 U5.5 U6.1 U6.2 U6.4 U6.5 U7.1 U7.2 U7.4 U7.5 U8.1 U8.2 U8.4 U8.5 U9.5 U9.6 U9.7 U9.9 U9.10 U9.11 U9.12 U9.15 U11.5 U11.6 U11.7 U11.9 U11.10 U11.11 U11.12 U11.15 U13.1 U13.2 U13.4 U13.5 U14.1 U14.2 U14.4 U14.5 U15.1 U15.2 U15.4 U15.5 U16.1 U16.2 U16.4 U16.5

## Polygon pours and split planes (outlines as drawn)
GND on Bottom Layer "Bottom Layer-No Net" (solid, remove dead copper, pour order 7): 2299.47,4576.37 5469.47,4576.37 5469.47,26.37 2299.47,26.37 2299.47,4576.37
GND on Top Layer "Bottom Layer-No Net" (solid, remove dead copper, pour order 5): 2300,4575 5470,4575 5470,25 2300,25 2300,4575

## Silkscreen, mask and mechanical layers (free items; w line width, h text height)
Top Overlay:
  text "GND" at 2650,4085 h60
  text "5V" at 2875,4085 h60
  text "GND" at 5030,4045 h60
  text "3V" at 5250,4040 h60
Mechanical 13:
  the board outline again, w10

## Dimensions
2300,25 to 2300,4575 on Top Overlay
2300,4575 to 5470,4575 on Top Overlay

## Text inside footprints (layer, text, board x,y; h text height)
P2: Top Overlay "2" at 5080,3205 h35 r270; Top Overlay "1" at 4980,3205 h35 r270; Top Overlay "1" at 4980,2525 h35 r270; Top Overlay "1" at 4980,2485 h35 r270; Top Overlay "12" at 5080,2525 h35 r270
P4: Top Overlay "2" at 3000,3165 h35 r270; Top Overlay "1" at 2900,3165 h35 r270; Top Overlay "31" at 2900,1505 h35 r270; Top Overlay "32" at 3000,1505 h35 r270